# EAGLE board 13595-SparkFun_Ardumoto-panel.v20 (EAGLE 7.5.0), part 1 of 5
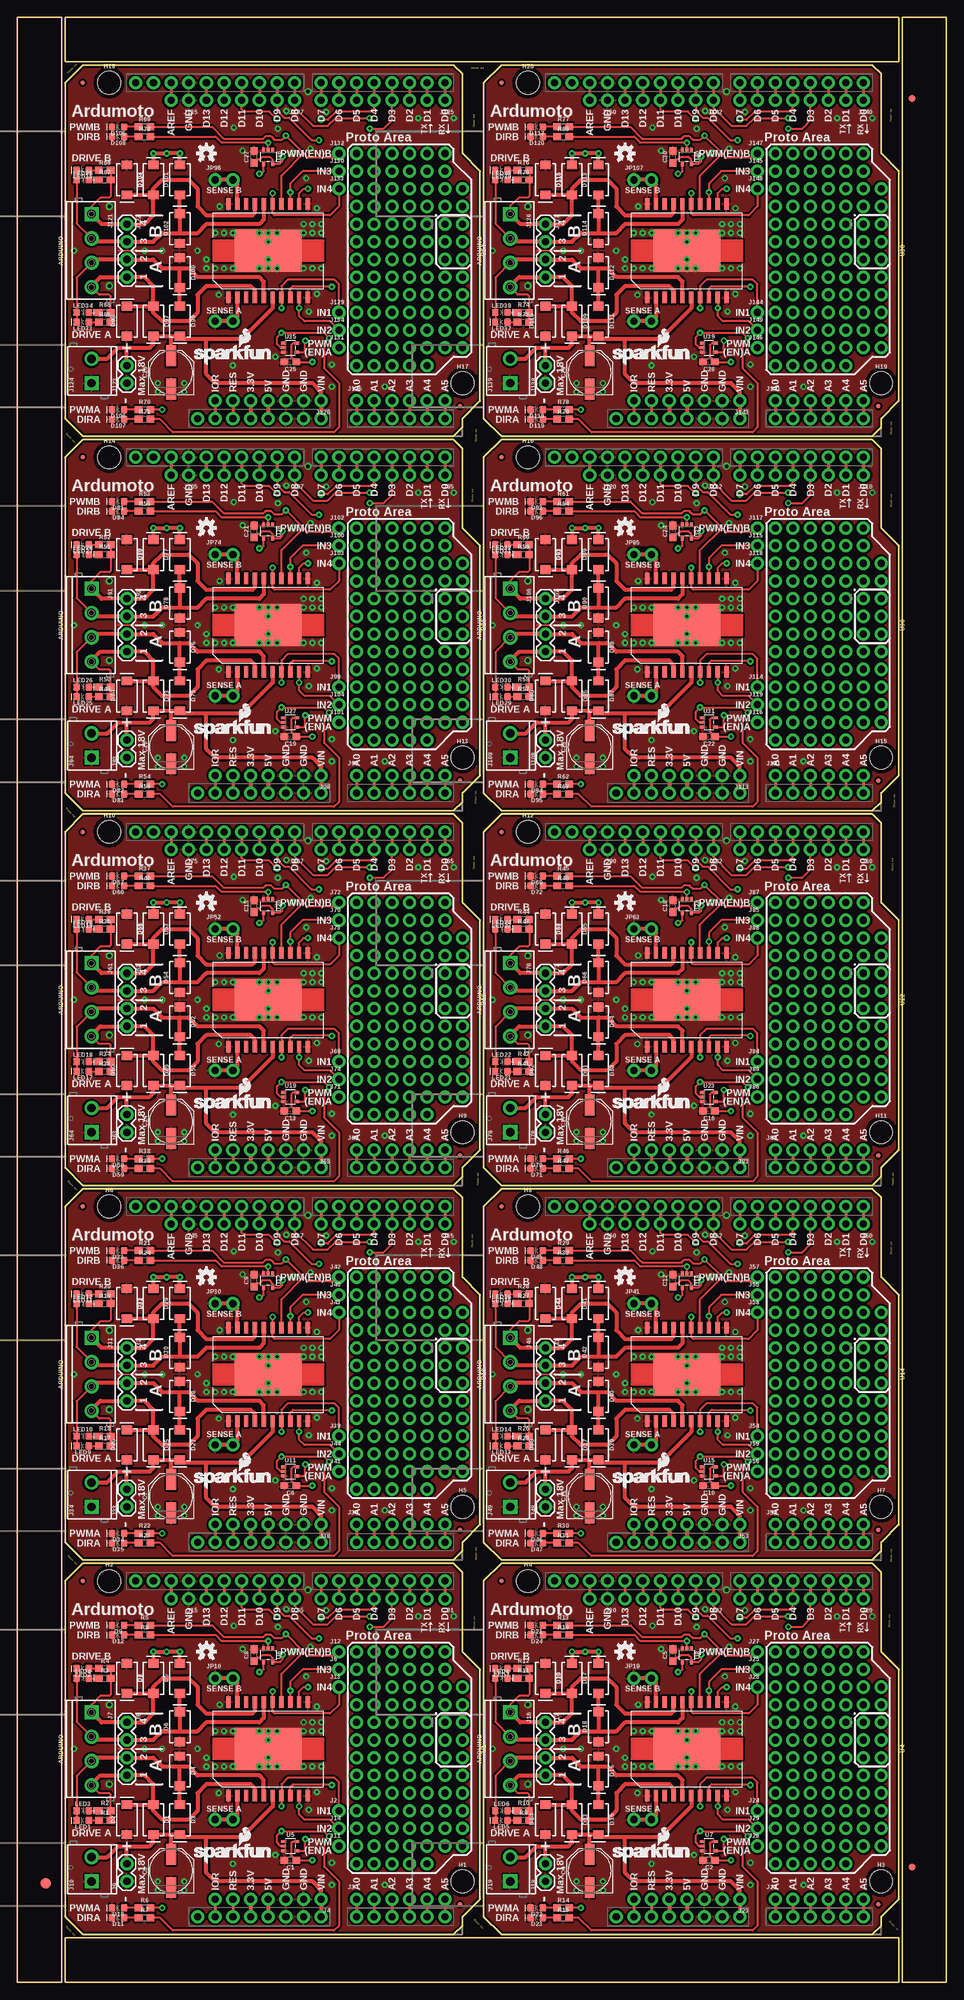
[diagram p0: board, top side]
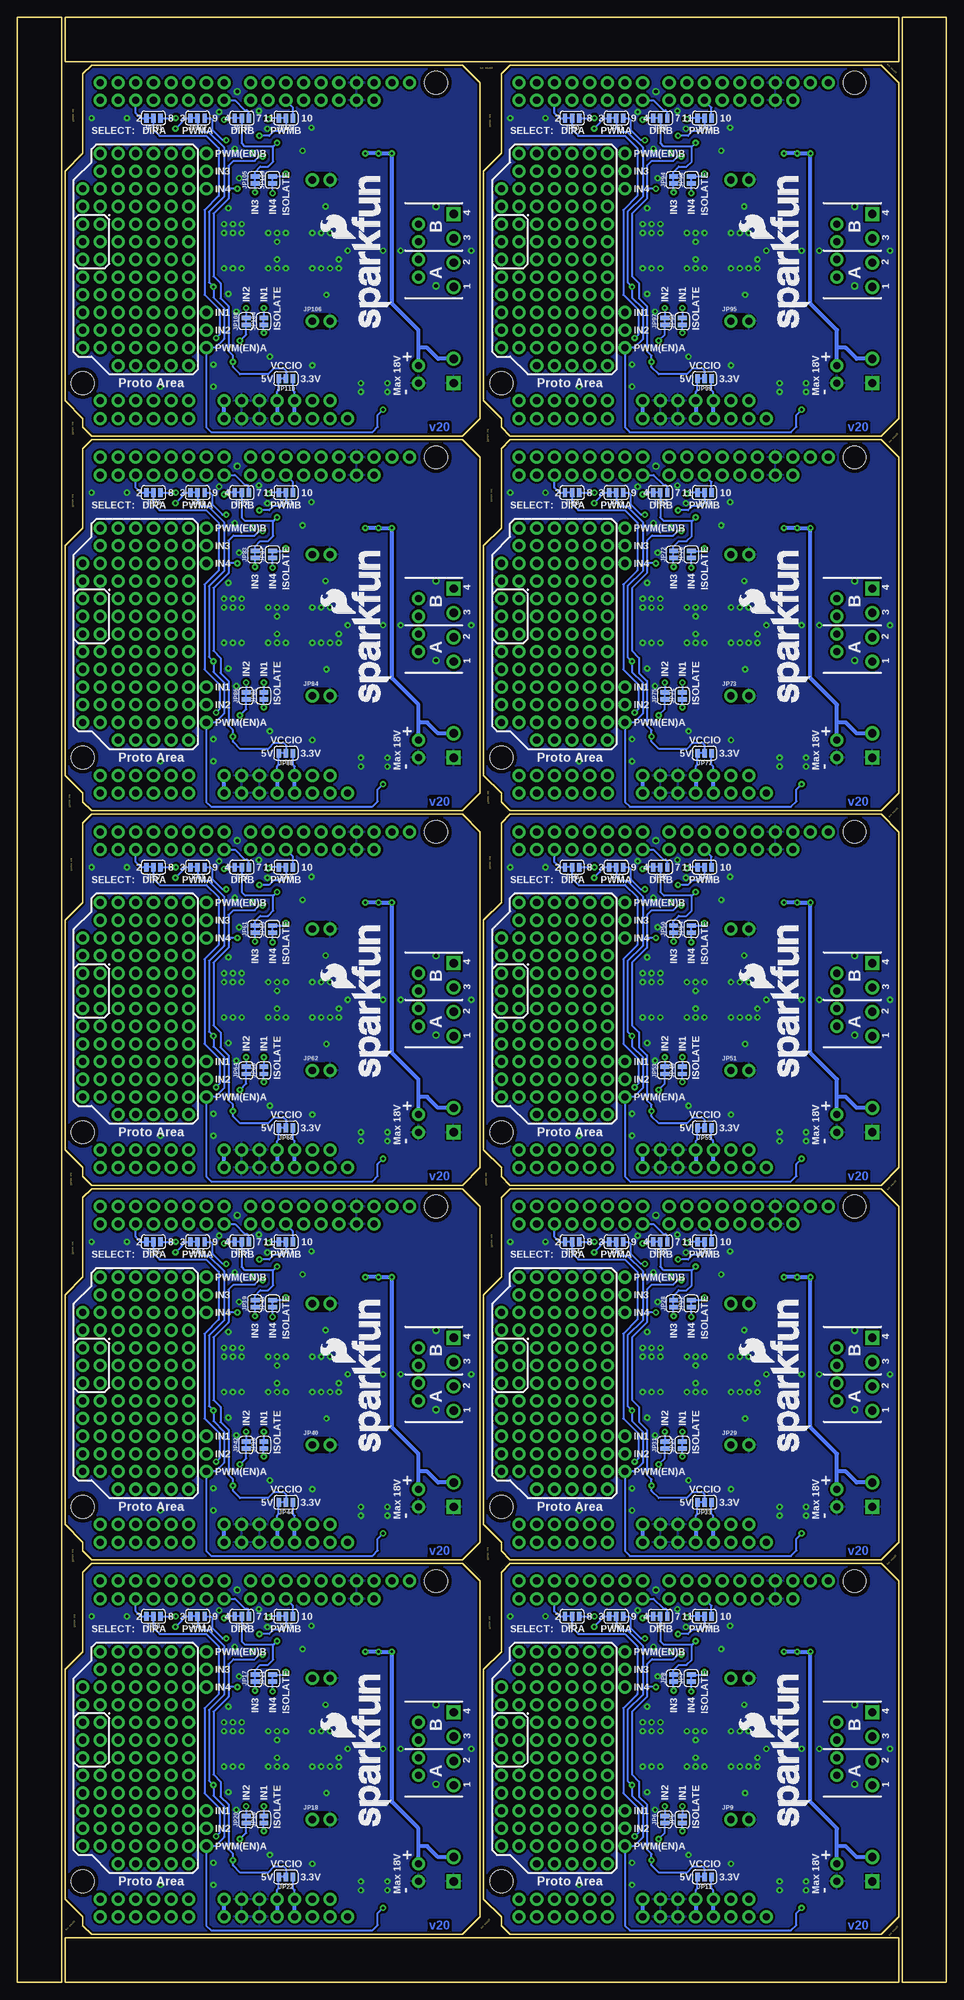
[diagram p1: board, bottom side, seen from below]

Size 133.6 x 282.45 mm. Coordinates in mm from the lower left corner, seen from the top.
Outline: 6.35,78.23 6.35,0 0,0 0,28.7
Outline: 0,26.16 0,282.45 6.35,282.45 6.35,75.69
Outline: 79.25,0 6.86,0 6.86,6.35 29.72,6.35
Outline: 27.18,6.35 126.75,6.35 126.75,0 76.71,0
Outline: 54.36,282.45 126.75,282.45 126.75,276.1 103.89,276.1
Outline: 106.43,276.1 6.86,276.1 6.86,282.45 56.9,282.45
Outline: 127.25,210.06 127.25,282.45 133.6,282.45 133.6,259.59
Outline: 133.6,262.13 133.6,0 127.25,0 127.25,212.6
Outline: 6.86,57.66 6.86,9.4 9.4,6.86 62.74,6.86 64.01,8.13 64.01,9.4 66.55,11.94 66.55,44.96 64.01,47.5 64.01,58.93 62.74,60.2 9.4,60.2 6.86,57.66
Outline: 67.06,57.66 67.06,9.4 69.6,6.86 122.94,6.86 124.21,8.13 124.21,9.4 126.75,11.94 126.75,44.96 124.21,47.5 124.21,58.93 122.94,60.2 69.6,60.2 67.06,57.66
Outline: 6.86,111.51 6.86,63.25 9.4,60.71 62.74,60.71 64.01,61.98 64.01,63.25 66.55,65.79 66.55,98.81 64.01,101.35 64.01,112.78 62.74,114.05 9.4,114.05 6.86,111.51
Outline: 67.06,111.51 67.06,63.25 69.6,60.71 122.94,60.71 124.21,61.98 124.21,63.25 126.75,65.79 126.75,98.81 124.21,101.35 124.21,112.78 122.94,114.05 69.6,114.05 67.06,111.51
Outline: 6.86,165.35 6.86,117.09 9.4,114.55 62.74,114.55 64.01,115.82 64.01,117.09 66.55,119.63 66.55,152.65 64.01,155.19 64.01,166.62 62.74,167.89 9.4,167.89 6.86,165.35
Outline: 67.06,165.35 67.06,117.09 69.6,114.55 122.94,114.55 124.21,115.82 124.21,117.09 126.75,119.63 126.75,152.65 124.21,155.19 124.21,166.62 122.94,167.89 69.6,167.89 67.06,165.35
Outline: 6.86,219.2 6.86,170.94 9.4,168.4 62.74,168.4 64.01,169.67 64.01,170.94 66.55,173.48 66.55,206.5 64.01,209.04 64.01,220.47 62.74,221.74 9.4,221.74 6.86,219.2
Outline: 67.06,219.2 67.06,170.94 69.6,168.4 122.94,168.4 124.21,169.67 124.21,170.94 126.75,173.48 126.75,206.5 124.21,209.04 124.21,220.47 122.94,221.74 69.6,221.74 67.06,219.2
Outline: 6.86,273.05 6.86,224.79 9.4,222.25 62.74,222.25 64.01,223.52 64.01,224.79 66.55,227.33 66.55,260.35 64.01,262.89 64.01,274.32 62.74,275.59 9.4,275.59 6.86,273.05
Outline: 67.06,273.05 67.06,224.79 69.6,222.25 122.94,222.25 124.21,223.52 124.21,224.79 126.75,227.33 126.75,260.35 124.21,262.89 124.21,274.32 122.94,275.59 69.6,275.59 67.06,273.05
Copper layers (1*16): Top 0.035mm / dielectric 1.5mm / Bottom 0.035mm
Design rules "SparkFun-2-layer-STANDARD": minimum track width 10mil, minimum drill 20mil, track to track 10mil, track to pad 8mil, pad to pad 8mil, via to via 10mil, smd to smd 8mil, copper to edge 8mil, drill to drill 8mil, minimum pad ring 10mil, minimum via ring 10mil, stop-mask expansion 4mil, vias tented up to drill 25mil, thermal gap 10mil
Net classes: 1 power: width 0.61 mm
tRestrict: area 29.1,22.5 to 31.9,24.2; area 29.1,42.8 to 31.9,44.6; area 89.3,22.5 to 92.1,24.2; area 89.3,42.8 to 92.1,44.6; area 29.1,76.3 to 31.9,78.1; area 29.1,96.7 to 31.9,98.4; area 89.3,76.3 to 92.1,78.1; area 89.3,96.7 to 92.1,98.4; area 29.1,130.2 to 31.9,131.9; area 29.1,150.5 to 31.9,152.3; area 89.3,130.2 to 92.1,131.9; area 89.3,150.5 to 92.1,152.3; area 29.1,184 to 31.9,185.8; area 29.1,204.4 to 31.9,206.1; area 89.3,184 to 92.1,185.8; area 89.3,204.4 to 92.1,206.1; area 29.1,237.9 to 31.9,239.6; area 29.1,258.2 to 31.9,260; area 89.3,237.9 to 92.1,239.6; area 89.3,258.2 to 92.1,260
bRestrict: area 29.1,22.5 to 31.9,24.2; area 29.1,42.8 to 31.9,44.6; area 89.3,22.5 to 92.1,24.2; area 89.3,42.8 to 92.1,44.6; area 29.1,76.3 to 31.9,78.1; area 29.1,96.7 to 31.9,98.4; area 89.3,76.3 to 92.1,78.1; area 89.3,96.7 to 92.1,98.4; area 29.1,130.2 to 31.9,131.9; area 29.1,150.5 to 31.9,152.3; area 89.3,130.2 to 92.1,131.9; area 89.3,150.5 to 92.1,152.3; area 29.1,184 to 31.9,185.8; area 29.1,204.4 to 31.9,206.1; area 89.3,184 to 92.1,185.8; area 89.3,204.4 to 92.1,206.1; area 29.1,237.9 to 31.9,239.6; area 29.1,258.2 to 31.9,260; area 89.3,237.9 to 92.1,239.6; area 89.3,258.2 to 92.1,260

## Footprints (pad centres in the part's own frame; a part is rotated, then mirrored left to right if it is on the bottom)
0603 = smd 1.1 x 1: 1 -0.85,0; 2 0.85,0
PANASONIC_D = smd 3 x 1.4: + 2.4,0; - -2.4,0
SMA-DIODE = smd 1.27 x 1.47: A -2.15,0; C 2.15,0
LED-0603 = smd 1 x 1: A -0.877,0; C 0.877,0
FIDUCIAL-1.5X3 = smd 1.5 x 1.5: 1 0,0
FIDUCIAL-1X2 = smd 1 x 1: 1 0,0
MICRO-FIDUCIAL = smd 0.635 x 0.635: 1 0,0
STAND-OFF = hole 3.302: 0,0
1X08_NO_SILK = drill 1.016 pad 1.88: 1 0,0; 2 2.54,0; 3 5.08,0; 4 7.62,0; 5 10.16,0; 6 12.7,0; 7 15.24,0; 8 17.78,0
1X01_NO_SILK = drill 1.016 pad 1.88: 1 0,0
1X06_NO_SILK = drill 1.016 pad 1.88: 1 0,0; 2 2.54,0; 3 5.08,0; 4 7.62,0; 5 10.16,0; 6 12.7,0
1X07_NO_SILK = drill 1.016 pad 1.88: 1 0,0; 2 2.54,0; 3 5.08,0; 4 7.62,0; 5 10.16,0; 6 12.7,0; 7 15.24,0
SCREWTERMINAL-3.5MM-4 = drill 1.2 pad 2.032 square: 1 0,0 | drill 1.2 pad 2.032: 2 3.5,0; 3 7,0; 4 10.5,0
1X04 = drill 1.016 pad 1.88: 1 0,0; 2 2.54,0; 3 5.08,0; 4 7.62,0
1X02 = drill 1.016 pad 1.88: 1 0,0; 2 2.54,0
SCREWTERMINAL-3.5MM-2 = drill 1.2 pad 2.032 square: 1 0,0 | drill 1.2 pad 2.032: 2 3.5,0
1X02_NO_SILK = drill 1.016 pad 1.88: 1 0,0; 2 2.54,0
SMT-JUMPER_3_1-NC_TRACE_SILK = smd 0.635 x 1.27: 1 -1.016,0; 2 0,0; 3 1.016,0
SMT-JUMPER_2_NC_TRACE_SILK = smd 0.635 x 1.27: 1 -0.508,0; 2 0.508,0
UNO_R3_SHIELD_NOLABELS = drill 1.016 pad 1.88: 3.3V 24.13,-3.81; 5V 24.13,-1.27; A0 24.13,11.43; A1 24.13,13.97; A2 24.13,16.51; A3 24.13,19.05; A4 24.13,21.59; A5 24.13,24.13; AREF -24.13,-15.24; D2 -24.13,19.05; D3 -24.13,16.51; D4 -24.13,13.97; D5 -24.13,11.43; D6 -24.13,8.89; D7 -24.13,6.35; D8 -24.13,2.54; D9 -24.13,0; D10 -24.13,-2.54; D11 -24.13,-5.08; D12 -24.13,-7.62; D13 -24.13,-10.16; GND@0 24.13,1.27; GND@1 24.13,3.81; GND@2 -24.13,-12.7; IOREF 24.13,-8.89; NC 24.13,-11.43; RES 24.13,-6.35; RX -24.13,24.13; SCL -24.13,-20.32; SDA -24.13,-17.78; TX -24.13,21.59; VIN 24.13,6.35
POWERSO20_L298_PAD = smd 1.651 x 0.635: 1 -6.731,5.715; 2 -6.731,4.445; 3 -6.731,3.175; 4 -6.731,1.905; 5 -6.731,0.635; 6 -6.731,-0.635; 7 -6.731,-1.905; 8 -6.731,-3.175; 9 -6.731,-4.445; 10 -6.731,-5.715; 11 6.731,-5.715; 12 6.731,-4.445; 13 6.731,-3.175; 14 6.731,-1.905; 15 6.731,-0.635; 16 6.731,0.635; 17 6.731,1.905; 18 6.731,3.175; 19 6.731,4.445; 20 6.731,5.715 | smd 5.994 x 9.601: PAD 0,0
SOT353 = smd 0.42 x 0.7: 1 -0.65,-0.95; 2 0,-0.95; 3 0.65,-0.95; 4 0.65,0.95; 5 -0.65,0.95

## Placement (x,y rotation side)
C1  0.1uF  [0603]  39.24,17.53 180 top
C2  0.1uF  [0603]  99.44,17.53 180 top
C3  100uF  [PANASONIC_D]  22.1,16 90 top
C4  100uF  [PANASONIC_D]  82.3,16 90 top
C5  0.1uF  [0603]  94.23,46.99 90 top
C6  0.1uF  [0603]  39.24,71.37 180 top
C7  100uF  [PANASONIC_D]  22.1,69.85 90 top
C8  0.1uF  [0603]  34.04,46.99 90 top
C9  0.1uF  [0603]  34.04,100.84 90 top
C10  0.1uF  [0603]  99.44,71.37 180 top
C11  100uF  [PANASONIC_D]  82.3,69.85 90 top
C12  0.1uF  [0603]  94.23,100.84 90 top
C13  0.1uF  [0603]  39.24,125.22 180 top
C14  100uF  [PANASONIC_D]  22.1,123.7 90 top
C15  0.1uF  [0603]  34.04,154.69 90 top
C16  0.1uF  [0603]  99.44,125.22 180 top
C17  100uF  [PANASONIC_D]  82.3,123.7 90 top
C18  0.1uF  [0603]  94.23,154.69 90 top
C19  0.1uF  [0603]  39.24,179.07 180 top
C20  100uF  [PANASONIC_D]  22.1,177.55 90 top
C21  0.1uF  [0603]  34.04,208.53 90 top
C22  0.1uF  [0603]  99.44,179.07 180 top
C23  100uF  [PANASONIC_D]  82.3,177.55 90 top
C24  0.1uF  [0603]  94.23,208.53 90 top
C25  0.1uF  [0603]  39.24,232.92 180 top
C26  100uF  [PANASONIC_D]  22.1,231.39 90 top
C27  0.1uF  [0603]  34.04,262.38 90 top
C28  0.1uF  [0603]  99.44,232.92 180 top
C29  100uF  [PANASONIC_D]  82.3,231.39 90 top
C30  0.1uF  [0603]  94.23,262.38 90 top
D1  1A/40V/500mV  [SMA-DIODE]  19.56,23.37 270 top
D2  1A/40V/500mV  [SMA-DIODE]  15.75,23.37 90 top
D3  1A/40V/500mV  [SMA-DIODE]  23.37,23.37 270 top
D4  1A/40V/500mV  [SMA-DIODE]  23.37,30.35 270 top
D5  1A/40V/500mV  [SMA-DIODE]  23.37,43.69 90 top
D6  1A/40V/500mV  [SMA-DIODE]  23.37,36.7 90 top
D7  1A/40V/500mV  [SMA-DIODE]  19.56,43.69 90 top
D8  1A/40V/500mV  [SMA-DIODE]  15.75,43.69 270 top
D9  RED  [LED-0603]  14.48,51.31 180 top
D10  RED  [LED-0603]  14.48,10.67 180 top
D11  RED  [LED-0603]  14.48,9.27 180 top
D12  RED  [LED-0603]  14.48,49.91 180 top
D13  1A/40V/500mV  [SMA-DIODE]  79.76,23.37 270 top
D14  1A/40V/500mV  [SMA-DIODE]  75.95,23.37 90 top
D15  1A/40V/500mV  [SMA-DIODE]  83.57,23.37 270 top
D16  1A/40V/500mV  [SMA-DIODE]  83.57,30.35 270 top
D17  1A/40V/500mV  [SMA-DIODE]  83.57,43.69 90 top
D18  1A/40V/500mV  [SMA-DIODE]  83.57,36.7 90 top
D19  1A/40V/500mV  [SMA-DIODE]  79.76,43.69 90 top
D20  1A/40V/500mV  [SMA-DIODE]  75.95,43.69 270 top
D21  RED  [LED-0603]  74.68,51.31 180 top
D22  RED  [LED-0603]  74.68,10.67 180 top
D23  RED  [LED-0603]  74.68,9.27 180 top
D24  RED  [LED-0603]  74.68,49.91 180 top
D25  1A/40V/500mV  [SMA-DIODE]  19.56,77.22 270 top
D26  1A/40V/500mV  [SMA-DIODE]  15.75,77.22 90 top
D27  1A/40V/500mV  [SMA-DIODE]  23.37,77.22 270 top
D28  1A/40V/500mV  [SMA-DIODE]  23.37,84.2 270 top
D29  1A/40V/500mV  [SMA-DIODE]  23.37,97.54 90 top
D30  1A/40V/500mV  [SMA-DIODE]  23.37,90.55 90 top
D31  1A/40V/500mV  [SMA-DIODE]  19.56,97.54 90 top
D32  1A/40V/500mV  [SMA-DIODE]  15.75,97.54 270 top
D33  RED  [LED-0603]  14.48,105.16 180 top
D34  RED  [LED-0603]  14.48,64.52 180 top
D35  RED  [LED-0603]  14.48,63.12 180 top
D36  RED  [LED-0603]  14.48,103.76 180 top
D37  1A/40V/500mV  [SMA-DIODE]  79.76,77.22 270 top
D38  1A/40V/500mV  [SMA-DIODE]  75.95,77.22 90 top
D39  1A/40V/500mV  [SMA-DIODE]  83.57,77.22 270 top
D40  1A/40V/500mV  [SMA-DIODE]  83.57,84.2 270 top
D41  1A/40V/500mV  [SMA-DIODE]  83.57,97.54 90 top
D42  1A/40V/500mV  [SMA-DIODE]  83.57,90.55 90 top
D43  1A/40V/500mV  [SMA-DIODE]  79.76,97.54 90 top
D44  1A/40V/500mV  [SMA-DIODE]  75.95,97.54 270 top
D45  RED  [LED-0603]  74.68,105.16 180 top
D46  RED  [LED-0603]  74.68,64.52 180 top
D47  RED  [LED-0603]  74.68,63.12 180 top
D48  RED  [LED-0603]  74.68,103.76 180 top
D49  1A/40V/500mV  [SMA-DIODE]  19.56,131.06 270 top
D50  1A/40V/500mV  [SMA-DIODE]  15.75,131.06 90 top
D51  1A/40V/500mV  [SMA-DIODE]  23.37,131.06 270 top
D52  1A/40V/500mV  [SMA-DIODE]  23.37,138.05 270 top
D53  1A/40V/500mV  [SMA-DIODE]  23.37,151.38 90 top
D54  1A/40V/500mV  [SMA-DIODE]  23.37,144.4 90 top
D55  1A/40V/500mV  [SMA-DIODE]  19.56,151.38 90 top
D56  1A/40V/500mV  [SMA-DIODE]  15.75,151.38 270 top
D57  RED  [LED-0603]  14.48,159 180 top
D58  RED  [LED-0603]  14.48,118.36 180 top
D59  RED  [LED-0603]  14.48,116.97 180 top
D60  RED  [LED-0603]  14.48,157.61 180 top
D61  1A/40V/500mV  [SMA-DIODE]  79.76,131.06 270 top
D62  1A/40V/500mV  [SMA-DIODE]  75.95,131.06 90 top
D63  1A/40V/500mV  [SMA-DIODE]  83.57,131.06 270 top
D64  1A/40V/500mV  [SMA-DIODE]  83.57,138.05 270 top
D65  1A/40V/500mV  [SMA-DIODE]  83.57,151.38 90 top
D66  1A/40V/500mV  [SMA-DIODE]  83.57,144.4 90 top
D67  1A/40V/500mV  [SMA-DIODE]  79.76,151.38 90 top
D68  1A/40V/500mV  [SMA-DIODE]  75.95,151.38 270 top
D69  RED  [LED-0603]  74.68,159 180 top
D70  RED  [LED-0603]  74.68,118.36 180 top
D71  RED  [LED-0603]  74.68,116.97 180 top
D72  RED  [LED-0603]  74.68,157.61 180 top
D73  1A/40V/500mV  [SMA-DIODE]  19.56,184.91 270 top
D74  1A/40V/500mV  [SMA-DIODE]  15.75,184.91 90 top
D75  1A/40V/500mV  [SMA-DIODE]  23.37,184.91 270 top
D76  1A/40V/500mV  [SMA-DIODE]  23.37,191.9 270 top
D77  1A/40V/500mV  [SMA-DIODE]  23.37,205.23 90 top
D78  1A/40V/500mV  [SMA-DIODE]  23.37,198.25 90 top
D79  1A/40V/500mV  [SMA-DIODE]  19.56,205.23 90 top
D80  1A/40V/500mV  [SMA-DIODE]  15.75,205.23 270 top
D81  RED  [LED-0603]  14.48,212.85 180 top
D82  RED  [LED-0603]  14.48,172.21 180 top
D83  RED  [LED-0603]  14.48,170.81 180 top
D84  RED  [LED-0603]  14.48,211.46 180 top
D85  1A/40V/500mV  [SMA-DIODE]  79.76,184.91 270 top
D86  1A/40V/500mV  [SMA-DIODE]  75.95,184.91 90 top
D87  1A/40V/500mV  [SMA-DIODE]  83.57,184.91 270 top
D88  1A/40V/500mV  [SMA-DIODE]  83.57,191.9 270 top
D89  1A/40V/500mV  [SMA-DIODE]  83.57,205.23 90 top
D90  1A/40V/500mV  [SMA-DIODE]  83.57,198.25 90 top
D91  1A/40V/500mV  [SMA-DIODE]  79.76,205.23 90 top
D92  1A/40V/500mV  [SMA-DIODE]  75.95,205.23 270 top
D93  RED  [LED-0603]  74.68,212.85 180 top
D94  RED  [LED-0603]  74.68,172.21 180 top
D95  RED  [LED-0603]  74.68,170.81 180 top
D96  RED  [LED-0603]  74.68,211.46 180 top
D97  1A/40V/500mV  [SMA-DIODE]  19.56,238.76 270 top
D98  1A/40V/500mV  [SMA-DIODE]  15.75,238.76 90 top
D99  1A/40V/500mV  [SMA-DIODE]  23.37,238.76 270 top
D100  1A/40V/500mV  [SMA-DIODE]  23.37,245.75 270 top
D101  1A/40V/500mV  [SMA-DIODE]  23.37,259.08 90 top
D102  1A/40V/500mV  [SMA-DIODE]  23.37,252.09 90 top
D103  1A/40V/500mV  [SMA-DIODE]  19.56,259.08 90 top
D104  1A/40V/500mV  [SMA-DIODE]  15.75,259.08 270 top
D105  RED  [LED-0603]  14.48,266.7 180 top
D106  RED  [LED-0603]  14.48,226.06 180 top
D107  RED  [LED-0603]  14.48,224.66 180 top
D108  RED  [LED-0603]  14.48,265.3 180 top
D109  1A/40V/500mV  [SMA-DIODE]  79.76,238.76 270 top
D110  1A/40V/500mV  [SMA-DIODE]  75.95,238.76 90 top
D111  1A/40V/500mV  [SMA-DIODE]  83.57,238.76 270 top
D112  1A/40V/500mV  [SMA-DIODE]  83.57,245.75 270 top
D113  1A/40V/500mV  [SMA-DIODE]  83.57,259.08 90 top
D114  1A/40V/500mV  [SMA-DIODE]  83.57,252.09 90 top
D115  1A/40V/500mV  [SMA-DIODE]  79.76,259.08 90 top
D116  1A/40V/500mV  [SMA-DIODE]  75.95,259.08 270 top
D117  RED  [LED-0603]  74.68,266.7 180 top
D118  RED  [LED-0603]  74.68,226.06 180 top
D119  RED  [LED-0603]  74.68,224.66 180 top
D120  RED  [LED-0603]  74.68,265.3 180 top
E$1  [FIDUCIAL-1.5X3]  4.06,14.22 0 top
E$7  [FIDUCIAL-1X2]  128.65,270.76 180 top
E$8  [FIDUCIAL-1X2]  128.65,16.51 0 top
FD1  FIDUCIALUFIDUCIAL  [MICRO-FIDUCIAL]  9.4,57.66 0 top
FD2  FIDUCIALUFIDUCIAL  [MICRO-FIDUCIAL]  63.63,11.18 0 top
FD3  FIDUCIALUFIDUCIAL  [MICRO-FIDUCIAL]  69.6,57.66 0 top
FD4  FIDUCIALUFIDUCIAL  [MICRO-FIDUCIAL]  123.83,11.18 0 top
FD5  FIDUCIALUFIDUCIAL  [MICRO-FIDUCIAL]  9.4,111.51 0 top
FD6  FIDUCIALUFIDUCIAL  [MICRO-FIDUCIAL]  63.63,65.02 0 top
FD7  FIDUCIALUFIDUCIAL  [MICRO-FIDUCIAL]  69.6,111.51 0 top
FD8  FIDUCIALUFIDUCIAL  [MICRO-FIDUCIAL]  123.83,65.02 0 top
FD9  FIDUCIALUFIDUCIAL  [MICRO-FIDUCIAL]  9.4,165.35 0 top
FD10  FIDUCIALUFIDUCIAL  [MICRO-FIDUCIAL]  63.63,118.87 0 top
FD11  FIDUCIALUFIDUCIAL  [MICRO-FIDUCIAL]  69.6,165.35 0 top
FD12  FIDUCIALUFIDUCIAL  [MICRO-FIDUCIAL]  123.83,118.87 0 top
FD13  FIDUCIALUFIDUCIAL  [MICRO-FIDUCIAL]  9.4,219.2 0 top
FD14  FIDUCIALUFIDUCIAL  [MICRO-FIDUCIAL]  63.63,172.72 0 top
FD15  FIDUCIALUFIDUCIAL  [MICRO-FIDUCIAL]  69.6,219.2 0 top
FD16  FIDUCIALUFIDUCIAL  [MICRO-FIDUCIAL]  123.83,172.72 0 top
FD17  FIDUCIALUFIDUCIAL  [MICRO-FIDUCIAL]  9.4,273.05 0 top
FD18  FIDUCIALUFIDUCIAL  [MICRO-FIDUCIAL]  63.63,226.57 0 top
FD19  FIDUCIALUFIDUCIAL  [MICRO-FIDUCIAL]  69.6,273.05 0 top
FD20  FIDUCIALUFIDUCIAL  [MICRO-FIDUCIAL]  123.83,226.57 0 top
H1  STAND-OFF  [STAND-OFF]  64.01,14.48 0 top
H2  STAND-OFF  [STAND-OFF]  13.21,57.66 0 top
H3  STAND-OFF  [STAND-OFF]  124.21,14.48 0 top
H4  STAND-OFF  [STAND-OFF]  73.41,57.66 0 top
H5  STAND-OFF  [STAND-OFF]  64.01,68.33 0 top
H6  STAND-OFF  [STAND-OFF]  13.21,111.51 0 top
H7  STAND-OFF  [STAND-OFF]  124.21,68.33 0 top
H8  STAND-OFF  [STAND-OFF]  73.41,111.51 0 top
H9  STAND-OFF  [STAND-OFF]  64.01,122.17 0 top
H10  STAND-OFF  [STAND-OFF]  13.21,165.35 0 top
H11  STAND-OFF  [STAND-OFF]  124.21,122.17 0 top
H12  STAND-OFF  [STAND-OFF]  73.41,165.35 0 top
H13  STAND-OFF  [STAND-OFF]  64.01,176.02 0 top
H14  STAND-OFF  [STAND-OFF]  13.21,219.2 0 top
H15  STAND-OFF  [STAND-OFF]  124.21,176.02 0 top
H16  STAND-OFF  [STAND-OFF]  73.41,219.2 0 top
H17  STAND-OFF  [STAND-OFF]  64.01,229.87 0 top
H18  STAND-OFF  [STAND-OFF]  13.21,273.05 0 top
H19  STAND-OFF  [STAND-OFF]  124.21,229.87 0 top
H20  STAND-OFF  [STAND-OFF]  73.41,273.05 0 top
J1  [1X08_NO_SILK]  61.47,55.12 180 top
J2  [1X01_NO_SILK]  46.23,24.64 0 top
J3  [1X06_NO_SILK]  48.77,11.94 0 top
J4  [1X07_NO_SILK]  43.69,11.94 180 top
J5  [1X06_NO_SILK]  39.88,55.12 180 top
J6  [1X01_NO_SILK]  46.23,44.96 0 top
J7  [SCREWTERMINAL-3.5MM-4]  10.67,38.79 270 top
J8  [1X04]  15.75,37.34 270 top
J9  [1X02]  15.75,14.48 90 top
J10  [SCREWTERMINAL-3.5MM-2]  10.67,14.48 90 top
J11  [1X01_NO_SILK]  46.23,19.56 0 top
J12  [1X01_NO_SILK]  46.23,47.5 0 top
J13  [1X01_NO_SILK]  46.23,42.42 0 top
J14  [1X01_NO_SILK]  46.23,22.1 0 top
J15  [1X02_NO_SILK]  24.64,55.12 180 top
J16  [SCREWTERMINAL-3.5MM-4]  70.87,38.79 270 top
J17  [1X04]  75.95,37.34 270 top
J18  [1X02]  75.95,14.48 90 top
J19  [SCREWTERMINAL-3.5MM-2]  70.87,14.48 90 top
J20  [1X08_NO_SILK]  121.67,55.12 180 top
J21  [1X06_NO_SILK]  108.97,11.94 0 top
J22  [1X06_NO_SILK]  100.08,55.12 180 top
J23  [1X07_NO_SILK]  103.89,11.94 180 top
J24  [1X01_NO_SILK]  106.43,24.64 0 top
J25  [1X01_NO_SILK]  106.43,44.96 0 top
J26  [1X01_NO_SILK]  106.43,19.56 0 top
J27  [1X01_NO_SILK]  106.43,47.5 0 top
J28  [1X01_NO_SILK]  106.43,42.42 0 top
J29  [1X01_NO_SILK]  106.43,22.1 0 top
J30  [1X02_NO_SILK]  84.84,55.12 180 top
J31  [SCREWTERMINAL-3.5MM-4]  10.67,92.63 270 top
J32  [1X04]  15.75,91.19 270 top
J33  [1X02]  15.75,68.33 90 top
J34  [SCREWTERMINAL-3.5MM-2]  10.67,68.33 90 top
J35  [1X08_NO_SILK]  61.47,108.97 180 top
J36  [1X06_NO_SILK]  48.77,65.79 0 top
J37  [1X06_NO_SILK]  39.88,108.97 180 top
J38  [1X07_NO_SILK]  43.69,65.79 180 top
J39  [1X01_NO_SILK]  46.23,78.49 0 top
J40  [1X01_NO_SILK]  46.23,98.81 0 top
J41  [1X01_NO_SILK]  46.23,73.41 0 top
J42  [1X01_NO_SILK]  46.23,101.35 0 top
J43  [1X01_NO_SILK]  46.23,96.27 0 top
J44  [1X01_NO_SILK]  46.23,75.95 0 top
J45  [1X02_NO_SILK]  24.64,108.97 180 top
J46  [SCREWTERMINAL-3.5MM-4]  70.87,92.63 270 top
J47  [1X04]  75.95,91.19 270 top
J48  [1X02]  75.95,68.33 90 top
J49  [SCREWTERMINAL-3.5MM-2]  70.87,68.33 90 top
J50  [1X08_NO_SILK]  121.67,108.97 180 top
J51  [1X06_NO_SILK]  108.97,65.79 0 top
J52  [1X06_NO_SILK]  100.08,108.97 180 top
J53  [1X07_NO_SILK]  103.89,65.79 180 top
J54  [1X01_NO_SILK]  106.43,78.49 0 top
J55  [1X01_NO_SILK]  106.43,98.81 0 top
J56  [1X01_NO_SILK]  106.43,73.41 0 top
J57  [1X01_NO_SILK]  106.43,101.35 0 top
J58  [1X01_NO_SILK]  106.43,96.27 0 top
J59  [1X01_NO_SILK]  106.43,75.95 0 top
J60  [1X02_NO_SILK]  84.84,108.97 180 top
J61  [SCREWTERMINAL-3.5MM-4]  10.67,146.48 270 top
J62  [1X04]  15.75,145.03 270 top
J63  [1X02]  15.75,122.17 90 top
J64  [SCREWTERMINAL-3.5MM-2]  10.67,122.17 90 top
J65  [1X08_NO_SILK]  61.47,162.81 180 top
J66  [1X06_NO_SILK]  48.77,119.63 0 top
J67  [1X06_NO_SILK]  39.88,162.81 180 top
J68  [1X07_NO_SILK]  43.69,119.63 180 top
J69  [1X01_NO_SILK]  46.23,132.33 0 top
J70  [1X01_NO_SILK]  46.23,152.65 0 top
J71  [1X01_NO_SILK]  46.23,127.25 0 top
J72  [1X01_NO_SILK]  46.23,155.19 0 top
J73  [1X01_NO_SILK]  46.23,150.11 0 top
J74  [1X01_NO_SILK]  46.23,129.79 0 top
J75  [1X02_NO_SILK]  24.64,162.81 180 top
J76  [SCREWTERMINAL-3.5MM-4]  70.87,146.48 270 top
J77  [1X04]  75.95,145.03 270 top
J78  [1X02]  75.95,122.17 90 top
J79  [SCREWTERMINAL-3.5MM-2]  70.87,122.17 90 top
J80  [1X08_NO_SILK]  121.67,162.81 180 top
J81  [1X06_NO_SILK]  108.97,119.63 0 top
J82  [1X06_NO_SILK]  100.08,162.81 180 top
J83  [1X07_NO_SILK]  103.89,119.63 180 top
J84  [1X01_NO_SILK]  106.43,132.33 0 top
J85  [1X01_NO_SILK]  106.43,152.65 0 top
J86  [1X01_NO_SILK]  106.43,127.25 0 top
J87  [1X01_NO_SILK]  106.43,155.19 0 top
J88  [1X01_NO_SILK]  106.43,150.11 0 top
J89  [1X01_NO_SILK]  106.43,129.79 0 top
J90  [1X02_NO_SILK]  84.84,162.81 180 top
J91  [SCREWTERMINAL-3.5MM-4]  10.67,200.33 270 top
J92  [1X04]  15.75,198.88 270 top
J93  [1X02]  15.75,176.02 90 top
J94  [SCREWTERMINAL-3.5MM-2]  10.67,176.02 90 top
J95  [1X08_NO_SILK]  61.47,216.66 180 top
J96  [1X06_NO_SILK]  48.77,173.48 0 top
J97  [1X06_NO_SILK]  39.88,216.66 180 top
J98  [1X07_NO_SILK]  43.69,173.48 180 top
J99  [1X01_NO_SILK]  46.23,186.18 0 top
J100  [1X01_NO_SILK]  46.23,206.5 0 top
J101  [1X01_NO_SILK]  46.23,181.1 0 top
J102  [1X01_NO_SILK]  46.23,209.04 0 top
J103  [1X01_NO_SILK]  46.23,203.96 0 top
J104  [1X01_NO_SILK]  46.23,183.64 0 top
J105  [1X02_NO_SILK]  24.64,216.66 180 top
J106  [SCREWTERMINAL-3.5MM-4]  70.87,200.33 270 top
J107  [1X04]  75.95,198.88 270 top
J108  [1X02]  75.95,176.02 90 top
J109  [SCREWTERMINAL-3.5MM-2]  70.87,176.02 90 top
J110  [1X08_NO_SILK]  121.67,216.66 180 top
J111  [1X06_NO_SILK]  108.97,173.48 0 top
J112  [1X06_NO_SILK]  100.08,216.66 180 top
J113  [1X07_NO_SILK]  103.89,173.48 180 top
J114  [1X01_NO_SILK]  106.43,186.18 0 top
J115  [1X01_NO_SILK]  106.43,206.5 0 top
J116  [1X01_NO_SILK]  106.43,181.1 0 top
J117  [1X01_NO_SILK]  106.43,209.04 0 top
J118  [1X01_NO_SILK]  106.43,203.96 0 top
J119  [1X01_NO_SILK]  106.43,183.64 0 top
J120  [1X02_NO_SILK]  84.84,216.66 180 top
J121  [SCREWTERMINAL-3.5MM-4]  10.67,254.18 270 top
J122  [1X04]  15.75,252.73 270 top
J123  [1X02]  15.75,229.87 90 top
J124  [SCREWTERMINAL-3.5MM-2]  10.67,229.87 90 top
J125  [1X08_NO_SILK]  61.47,270.51 180 top
J126  [1X06_NO_SILK]  48.77,227.33 0 top
J127  [1X06_NO_SILK]  39.88,270.51 180 top
J128  [1X07_NO_SILK]  43.69,227.33 180 top
J129  [1X01_NO_SILK]  46.23,240.03 0 top
J130  [1X01_NO_SILK]  46.23,260.35 0 top
J131  [1X01_NO_SILK]  46.23,234.95 0 top
J132  [1X01_NO_SILK]  46.23,262.89 0 top
J133  [1X01_NO_SILK]  46.23,257.81 0 top
J134  [1X01_NO_SILK]  46.23,237.49 0 top
J135  [1X02_NO_SILK]  24.64,270.51 180 top
J136  [SCREWTERMINAL-3.5MM-4]  70.87,254.18 270 top
J137  [1X04]  75.95,252.73 270 top
J138  [1X02]  75.95,229.87 90 top
J139  [SCREWTERMINAL-3.5MM-2]  70.87,229.87 90 top
J140  [1X08_NO_SILK]  121.67,270.51 180 top
J141  [1X06_NO_SILK]  108.97,227.33 0 top
J142  [1X06_NO_SILK]  100.08,270.51 180 top
J143  [1X07_NO_SILK]  103.89,227.33 180 top
J144  [1X01_NO_SILK]  106.43,240.03 0 top
J145  [1X01_NO_SILK]  106.43,260.35 0 top
J146  [1X01_NO_SILK]  106.43,234.95 0 top
J147  [1X01_NO_SILK]  106.43,262.89 0 top
J148  [1X01_NO_SILK]  106.43,257.81 0 top
J149  [1X01_NO_SILK]  106.43,237.49 0 top
J150  [1X02_NO_SILK]  84.84,270.51 180 top
JP1  31NCT  [SMT-JUMPER_3_1-NC_TRACE_SILK]  53.85,52.58 180 bottom
JP2  31NCT  [SMT-JUMPER_3_1-NC_TRACE_SILK]  47.5,52.58 180 bottom
JP3  31NCT  [SMT-JUMPER_3_1-NC_TRACE_SILK]  41.15,52.58 180 bottom
JP4  31NCT  [SMT-JUMPER_3_1-NC_TRACE_SILK]  34.8,52.58 180 bottom
JP5  2NCT  [SMT-JUMPER_2_NC_TRACE_SILK]  37.97,23.37 90 bottom
JP6  2NCT  [SMT-JUMPER_2_NC_TRACE_SILK]  40.51,23.37 90 bottom
JP7  2NCT  [SMT-JUMPER_2_NC_TRACE_SILK]  36.7,43.69 90 bottom
JP8  2NCT  [SMT-JUMPER_2_NC_TRACE_SILK]  39.24,43.69 90 bottom
JP9  [1X02_NO_SILK]  30.99,23.37 0 bottom
JP10  [1X02_NO_SILK]  28.45,43.69 0 top
JP11  31NCT  [SMT-JUMPER_3_1-NC_TRACE_SILK]  34.8,15.11 180 bottom
JP12  31NCT  [SMT-JUMPER_3_1-NC_TRACE_SILK]  101.35,52.58 180 bottom
JP13  31NCT  [SMT-JUMPER_3_1-NC_TRACE_SILK]  114.05,52.58 180 bottom
JP14  31NCT  [SMT-JUMPER_3_1-NC_TRACE_SILK]  107.7,52.58 180 bottom
JP15  31NCT  [SMT-JUMPER_3_1-NC_TRACE_SILK]  95,52.58 180 bottom
JP16  2NCT  [SMT-JUMPER_2_NC_TRACE_SILK]  98.17,23.37 90 bottom
JP17  2NCT  [SMT-JUMPER_2_NC_TRACE_SILK]  99.44,43.69 90 bottom
JP18  [1X02_NO_SILK]  91.19,23.37 0 bottom
JP19  [1X02_NO_SILK]  88.65,43.69 0 top
JP20  2NCT  [SMT-JUMPER_2_NC_TRACE_SILK]  100.71,23.37 90 bottom
JP21  2NCT  [SMT-JUMPER_2_NC_TRACE_SILK]  96.9,43.69 90 bottom
JP22  31NCT  [SMT-JUMPER_3_1-NC_TRACE_SILK]  95,15.11 180 bottom
JP23  31NCT  [SMT-JUMPER_3_1-NC_TRACE_SILK]  41.15,106.43 180 bottom
JP24  31NCT  [SMT-JUMPER_3_1-NC_TRACE_SILK]  53.85,106.43 180 bottom
JP25  31NCT  [SMT-JUMPER_3_1-NC_TRACE_SILK]  47.5,106.43 180 bottom
JP26  31NCT  [SMT-JUMPER_3_1-NC_TRACE_SILK]  34.8,106.43 180 bottom
JP27  2NCT  [SMT-JUMPER_2_NC_TRACE_SILK]  37.97,77.22 90 bottom
JP28  2NCT  [SMT-JUMPER_2_NC_TRACE_SILK]  39.24,97.54 90 bottom
JP29  [1X02_NO_SILK]  30.99,77.22 0 bottom
JP30  [1X02_NO_SILK]  28.45,97.54 0 top
JP31  2NCT  [SMT-JUMPER_2_NC_TRACE_SILK]  40.51,77.22 90 bottom
JP32  2NCT  [SMT-JUMPER_2_NC_TRACE_SILK]  36.7,97.54 90 bottom
JP33  31NCT  [SMT-JUMPER_3_1-NC_TRACE_SILK]  34.8,68.96 180 bottom
JP34  31NCT  [SMT-JUMPER_3_1-NC_TRACE_SILK]  101.35,106.43 180 bottom
JP35  31NCT  [SMT-JUMPER_3_1-NC_TRACE_SILK]  114.05,106.43 180 bottom
JP36  31NCT  [SMT-JUMPER_3_1-NC_TRACE_SILK]  107.7,106.43 180 bottom
JP37  31NCT  [SMT-JUMPER_3_1-NC_TRACE_SILK]  95,106.43 180 bottom
JP38  2NCT  [SMT-JUMPER_2_NC_TRACE_SILK]  98.17,77.22 90 bottom
JP39  2NCT  [SMT-JUMPER_2_NC_TRACE_SILK]  99.44,97.54 90 bottom
JP40  [1X02_NO_SILK]  91.19,77.22 0 bottom
JP41  [1X02_NO_SILK]  88.65,97.54 0 top
JP42  2NCT  [SMT-JUMPER_2_NC_TRACE_SILK]  100.71,77.22 90 bottom
JP43  2NCT  [SMT-JUMPER_2_NC_TRACE_SILK]  96.9,97.54 90 bottom
JP44  31NCT  [SMT-JUMPER_3_1-NC_TRACE_SILK]  95,68.96 180 bottom
JP45  31NCT  [SMT-JUMPER_3_1-NC_TRACE_SILK]  41.15,160.27 180 bottom
JP46  31NCT  [SMT-JUMPER_3_1-NC_TRACE_SILK]  53.85,160.27 180 bottom
JP47  31NCT  [SMT-JUMPER_3_1-NC_TRACE_SILK]  47.5,160.27 180 bottom
JP48  31NCT  [SMT-JUMPER_3_1-NC_TRACE_SILK]  34.8,160.27 180 bottom
JP49  2NCT  [SMT-JUMPER_2_NC_TRACE_SILK]  37.97,131.06 90 bottom
JP50  2NCT  [SMT-JUMPER_2_NC_TRACE_SILK]  39.24,151.38 90 bottom
JP51  [1X02_NO_SILK]  30.99,131.06 0 bottom
JP52  [1X02_NO_SILK]  28.45,151.38 0 top
JP53  2NCT  [SMT-JUMPER_2_NC_TRACE_SILK]  40.51,131.06 90 bottom
JP54  2NCT  [SMT-JUMPER_2_NC_TRACE_SILK]  36.7,151.38 90 bottom
JP55  31NCT  [SMT-JUMPER_3_1-NC_TRACE_SILK]  34.8,122.81 180 bottom
JP56  31NCT  [SMT-JUMPER_3_1-NC_TRACE_SILK]  101.35,160.27 180 bottom
JP57  31NCT  [SMT-JUMPER_3_1-NC_TRACE_SILK]  114.05,160.27 180 bottom
JP58  31NCT  [SMT-JUMPER_3_1-NC_TRACE_SILK]  107.7,160.27 180 bottom
JP59  31NCT  [SMT-JUMPER_3_1-NC_TRACE_SILK]  95,160.27 180 bottom
JP60  2NCT  [SMT-JUMPER_2_NC_TRACE_SILK]  98.17,131.06 90 bottom
JP61  2NCT  [SMT-JUMPER_2_NC_TRACE_SILK]  99.44,151.38 90 bottom
JP62  [1X02_NO_SILK]  91.19,131.06 0 bottom
JP63  [1X02_NO_SILK]  88.65,151.38 0 top
JP64  2NCT  [SMT-JUMPER_2_NC_TRACE_SILK]  100.71,131.06 90 bottom
JP65  2NCT  [SMT-JUMPER_2_NC_TRACE_SILK]  96.9,151.38 90 bottom
JP66  31NCT  [SMT-JUMPER_3_1-NC_TRACE_SILK]  95,122.81 180 bottom
JP67  31NCT  [SMT-JUMPER_3_1-NC_TRACE_SILK]  41.15,214.12 180 bottom
JP68  31NCT  [SMT-JUMPER_3_1-NC_TRACE_SILK]  53.85,214.12 180 bottom
JP69  31NCT  [SMT-JUMPER_3_1-NC_TRACE_SILK]  47.5,214.12 180 bottom
JP70  31NCT  [SMT-JUMPER_3_1-NC_TRACE_SILK]  34.8,214.12 180 bottom
JP71  2NCT  [SMT-JUMPER_2_NC_TRACE_SILK]  37.97,184.91 90 bottom
JP72  2NCT  [SMT-JUMPER_2_NC_TRACE_SILK]  39.24,205.23 90 bottom
JP73  [1X02_NO_SILK]  30.99,184.91 0 bottom
JP74  [1X02_NO_SILK]  28.45,205.23 0 top
JP75  2NCT  [SMT-JUMPER_2_NC_TRACE_SILK]  40.51,184.91 90 bottom
JP76  2NCT  [SMT-JUMPER_2_NC_TRACE_SILK]  36.7,205.23 90 bottom
JP77  31NCT  [SMT-JUMPER_3_1-NC_TRACE_SILK]  34.8,176.66 180 bottom
JP78  31NCT  [SMT-JUMPER_3_1-NC_TRACE_SILK]  101.35,214.12 180 bottom
JP79  31NCT  [SMT-JUMPER_3_1-NC_TRACE_SILK]  114.05,214.12 180 bottom
JP80  31NCT  [SMT-JUMPER_3_1-NC_TRACE_SILK]  107.7,214.12 180 bottom
JP81  31NCT  [SMT-JUMPER_3_1-NC_TRACE_SILK]  95,214.12 180 bottom
JP82  2NCT  [SMT-JUMPER_2_NC_TRACE_SILK]  98.17,184.91 90 bottom
JP83  2NCT  [SMT-JUMPER_2_NC_TRACE_SILK]  99.44,205.23 90 bottom
JP84  [1X02_NO_SILK]  91.19,184.91 0 bottom
JP85  [1X02_NO_SILK]  88.65,205.23 0 top
JP86  2NCT  [SMT-JUMPER_2_NC_TRACE_SILK]  100.71,184.91 90 bottom
JP87  2NCT  [SMT-JUMPER_2_NC_TRACE_SILK]  96.9,205.23 90 bottom
JP88  31NCT  [SMT-JUMPER_3_1-NC_TRACE_SILK]  95,176.66 180 bottom
JP89  31NCT  [SMT-JUMPER_3_1-NC_TRACE_SILK]  41.15,267.97 180 bottom
JP90  31NCT  [SMT-JUMPER_3_1-NC_TRACE_SILK]  53.85,267.97 180 bottom
JP91  31NCT  [SMT-JUMPER_3_1-NC_TRACE_SILK]  47.5,267.97 180 bottom
JP92  31NCT  [SMT-JUMPER_3_1-NC_TRACE_SILK]  34.8,267.97 180 bottom
JP93  2NCT  [SMT-JUMPER_2_NC_TRACE_SILK]  37.97,238.76 90 bottom
JP94  2NCT  [SMT-JUMPER_2_NC_TRACE_SILK]  39.24,259.08 90 bottom
JP95  [1X02_NO_SILK]  30.99,238.76 0 bottom
JP96  [1X02_NO_SILK]  28.45,259.08 0 top
JP97  2NCT  [SMT-JUMPER_2_NC_TRACE_SILK]  40.51,238.76 90 bottom
JP98  2NCT  [SMT-JUMPER_2_NC_TRACE_SILK]  36.7,259.08 90 bottom
JP99  31NCT  [SMT-JUMPER_3_1-NC_TRACE_SILK]  34.8,230.5 180 bottom
JP100  31NCT  [SMT-JUMPER_3_1-NC_TRACE_SILK]  101.35,267.97 180 bottom
JP101  31NCT  [SMT-JUMPER_3_1-NC_TRACE_SILK]  114.05,267.97 180 bottom
JP102  31NCT  [SMT-JUMPER_3_1-NC_TRACE_SILK]  107.7,267.97 180 bottom
JP103  31NCT  [SMT-JUMPER_3_1-NC_TRACE_SILK]  95,267.97 180 bottom
JP104  2NCT  [SMT-JUMPER_2_NC_TRACE_SILK]  98.17,238.76 90 bottom
JP105  2NCT  [SMT-JUMPER_2_NC_TRACE_SILK]  99.44,259.08 90 bottom
JP106  [1X02_NO_SILK]  91.19,238.76 0 bottom
JP107  [1X02_NO_SILK]  88.65,259.08 0 top
JP108  2NCT  [SMT-JUMPER_2_NC_TRACE_SILK]  100.71,238.76 90 bottom
JP109  2NCT  [SMT-JUMPER_2_NC_TRACE_SILK]  96.9,259.08 90 bottom
JP110  31NCT  [SMT-JUMPER_3_1-NC_TRACE_SILK]  95,230.5 180 bottom
LED1  Yellow  [LED-0603]  9.4,23.24 180 top
LED2  Yellow  [LED-0603]  9.4,45.09 180 top
LED3  BLUE  [LED-0603]  9.4,24.64 0 top
LED4  BLUE  [LED-0603]  9.4,43.69 0 top
LED5  Yellow  [LED-0603]  69.6,23.24 180 top
LED6  BLUE  [LED-0603]  69.6,24.64 0 top
LED7  Yellow  [LED-0603]  69.6,45.09 180 top
LED8  BLUE  [LED-0603]  69.6,43.69 0 top
LED9  Yellow  [LED-0603]  9.4,77.09 180 top
LED10  BLUE  [LED-0603]  9.4,78.49 0 top
LED11  Yellow  [LED-0603]  9.4,98.93 180 top
LED12  BLUE  [LED-0603]  9.4,97.54 0 top
LED13  Yellow  [LED-0603]  69.6,77.09 180 top
LED14  BLUE  [LED-0603]  69.6,78.49 0 top
LED15  Yellow  [LED-0603]  69.6,98.93 180 top
LED16  BLUE  [LED-0603]  69.6,97.54 0 top
LED17  Yellow  [LED-0603]  9.4,130.94 180 top
LED18  BLUE  [LED-0603]  9.4,132.33 0 top
LED19  Yellow  [LED-0603]  9.4,152.78 180 top
LED20  BLUE  [LED-0603]  9.4,151.38 0 top
LED21  Yellow  [LED-0603]  69.6,130.94 180 top
LED22  BLUE  [LED-0603]  69.6,132.33 0 top
LED23  Yellow  [LED-0603]  69.6,152.78 180 top
LED24  BLUE  [LED-0603]  69.6,151.38 0 top
LED25  Yellow  [LED-0603]  9.4,184.78 180 top
LED26  BLUE  [LED-0603]  9.4,186.18 0 top
LED27  Yellow  [LED-0603]  9.4,206.63 180 top
LED28  BLUE  [LED-0603]  9.4,205.23 0 top
LED29  Yellow  [LED-0603]  69.6,184.78 180 top
LED30  BLUE  [LED-0603]  69.6,186.18 0 top
LED31  Yellow  [LED-0603]  69.6,206.63 180 top
LED32  BLUE  [LED-0603]  69.6,205.23 0 top
LED33  Yellow  [LED-0603]  9.4,238.63 180 top
LED34  BLUE  [LED-0603]  9.4,240.03 0 top
LED35  Yellow  [LED-0603]  9.4,260.48 180 top
LED36  BLUE  [LED-0603]  9.4,259.08 0 top
LED37  Yellow  [LED-0603]  69.6,238.63 180 top
LED38  BLUE  [LED-0603]  69.6,240.03 0 top
LED39  Yellow  [LED-0603]  69.6,260.48 180 top
LED40  BLUE  [LED-0603]  69.6,259.08 0 top
LOGO1  SFE_LOGO_NAME_FLAME.2_INCH  [SFE_LOGO_NAME_FLAME_.2]  19.56,21.72 90 bottom
LOGO2  SFE_LOGO_NAME_FLAME.1_INCH  [SFE_LOGO_NAME_FLAME_.1]  25.02,17.02 0 top
LOGO3  SFE_LOGO_NAME_FLAME.2_INCH  [SFE_LOGO_NAME_FLAME_.2]  79.76,21.72 90 bottom
LOGO4  SFE_LOGO_NAME_FLAME.1_INCH  [SFE_LOGO_NAME_FLAME_.1]  85.22,17.02 0 top
LOGO5  SFE_LOGO_NAME_FLAME.2_INCH  [SFE_LOGO_NAME_FLAME_.2]  19.56,75.56 90 bottom
LOGO6  SFE_LOGO_NAME_FLAME.1_INCH  [SFE_LOGO_NAME_FLAME_.1]  25.02,70.87 0 top
LOGO7  SFE_LOGO_NAME_FLAME.2_INCH  [SFE_LOGO_NAME_FLAME_.2]  79.76,75.56 90 bottom
LOGO8  SFE_LOGO_NAME_FLAME.1_INCH  [SFE_LOGO_NAME_FLAME_.1]  85.22,70.87 0 top
LOGO9  SFE_LOGO_NAME_FLAME.2_INCH  [SFE_LOGO_NAME_FLAME_.2]  19.56,129.41 90 bottom
LOGO10  SFE_LOGO_NAME_FLAME.1_INCH  [SFE_LOGO_NAME_FLAME_.1]  25.02,124.71 0 top
LOGO11  SFE_LOGO_NAME_FLAME.2_INCH  [SFE_LOGO_NAME_FLAME_.2]  79.76,129.41 90 bottom
LOGO12  SFE_LOGO_NAME_FLAME.1_INCH  [SFE_LOGO_NAME_FLAME_.1]  85.22,124.71 0 top
LOGO13  SFE_LOGO_NAME_FLAME.2_INCH  [SFE_LOGO_NAME_FLAME_.2]  19.56,183.26 90 bottom
LOGO14  SFE_LOGO_NAME_FLAME.1_INCH  [SFE_LOGO_NAME_FLAME_.1]  25.02,178.56 0 top
LOGO15  SFE_LOGO_NAME_FLAME.2_INCH  [SFE_LOGO_NAME_FLAME_.2]  79.76,183.26 90 bottom
LOGO16  SFE_LOGO_NAME_FLAME.1_INCH  [SFE_LOGO_NAME_FLAME_.1]  85.22,178.56 0 top
LOGO17  SFE_LOGO_NAME_FLAME.2_INCH  [SFE_LOGO_NAME_FLAME_.2]  19.56,237.11 90 bottom
LOGO18  SFE_LOGO_NAME_FLAME.1_INCH  [SFE_LOGO_NAME_FLAME_.1]  25.02,232.41 0 top
LOGO19  SFE_LOGO_NAME_FLAME.2_INCH  [SFE_LOGO_NAME_FLAME_.2]  79.76,237.11 90 bottom
LOGO20  SFE_LOGO_NAME_FLAME.1_INCH  [SFE_LOGO_NAME_FLAME_.1]  85.22,232.41 0 top
R1  1k  [0603]  12.57,23.24 0 top
R2  1k  [0603]  12.57,24.64 0 top
R3  1k  [0603]  12.57,43.69 0 top
R4  1k  [0603]  12.57,45.09 0 top
R5  1k  [0603]  18.29,51.31 0 top
R6  1k  [0603]  18.29,10.67 0 top
R7  1k  [0603]  18.29,9.27 0 top
R8  1k  [0603]  18.29,49.91 0 top
R9  1k  [0603]  72.77,23.24 0 top
R10  1k  [0603]  72.77,24.64 0 top
R11  1k  [0603]  72.77,43.69 0 top
R12  1k  [0603]  72.77,45.09 0 top
R13  1k  [0603]  78.49,51.31 0 top
R14  1k  [0603]  78.49,10.67 0 top
R15  1k  [0603]  78.49,9.27 0 top
R16  1k  [0603]  78.49,49.91 0 top
R17  1k  [0603]  12.57,77.09 0 top
R18  1k  [0603]  12.57,78.49 0 top
R19  1k  [0603]  12.57,97.54 0 top
R20  1k  [0603]  12.57,98.93 0 top
R21  1k  [0603]  18.29,105.16 0 top
R22  1k  [0603]  18.29,64.52 0 top
R23  1k  [0603]  18.29,63.12 0 top
R24  1k  [0603]  18.29,103.76 0 top
R25  1k  [0603]  72.77,77.09 0 top
R26  1k  [0603]  72.77,78.49 0 top
R27  1k  [0603]  72.77,97.54 0 top
R28  1k  [0603]  72.77,98.93 0 top
R29  1k  [0603]  78.49,105.16 0 top
R30  1k  [0603]  78.49,64.52 0 top
R31  1k  [0603]  78.49,63.12 0 top
R32  1k  [0603]  78.49,103.76 0 top
R33  1k  [0603]  12.57,130.94 0 top
R34  1k  [0603]  12.57,132.33 0 top
R35  1k  [0603]  12.57,151.38 0 top
R36  1k  [0603]  12.57,152.78 0 top
R37  1k  [0603]  18.29,159 0 top
R38  1k  [0603]  18.29,118.36 0 top
R39  1k  [0603]  18.29,116.97 0 top
R40  1k  [0603]  18.29,157.61 0 top
R41  1k  [0603]  72.77,130.94 0 top
R42  1k  [0603]  72.77,132.33 0 top
R43  1k  [0603]  72.77,151.38 0 top
R44  1k  [0603]  72.77,152.78 0 top
R45  1k  [0603]  78.49,159 0 top
R46  1k  [0603]  78.49,118.36 0 top
R47  1k  [0603]  78.49,116.97 0 top
R48  1k  [0603]  78.49,157.61 0 top
R49  1k  [0603]  12.57,184.78 0 top
R50  1k  [0603]  12.57,186.18 0 top
R51  1k  [0603]  12.57,205.23 0 top
R52  1k  [0603]  12.57,206.63 0 top
R53  1k  [0603]  18.29,212.85 0 top
R54  1k  [0603]  18.29,172.21 0 top
R55  1k  [0603]  18.29,170.81 0 top
R56  1k  [0603]  18.29,211.46 0 top
R57  1k  [0603]  72.77,184.78 0 top
R58  1k  [0603]  72.77,186.18 0 top
R59  1k  [0603]  72.77,205.23 0 top
R60  1k  [0603]  72.77,206.63 0 top
R61  1k  [0603]  78.49,212.85 0 top
R62  1k  [0603]  78.49,172.21 0 top
R63  1k  [0603]  78.49,170.81 0 top
R64  1k  [0603]  78.49,211.46 0 top
R65  1k  [0603]  12.57,238.63 0 top
R66  1k  [0603]  12.57,240.03 0 top
R67  1k  [0603]  12.57,259.08 0 top
R68  1k  [0603]  12.57,260.48 0 top
R69  1k  [0603]  18.29,266.7 0 top
R70  1k  [0603]  18.29,226.06 0 top
R71  1k  [0603]  18.29,224.66 0 top
R72  1k  [0603]  18.29,265.3 0 top
R73  1k  [0603]  72.77,238.63 0 top
R74  1k  [0603]  72.77,240.03 0 top
R75  1k  [0603]  72.77,259.08 0 top
R76  1k  [0603]  72.77,260.48 0 top
R77  1k  [0603]  78.49,266.7 0 top
R78  1k  [0603]  78.49,226.06 0 top
R79  1k  [0603]  78.49,224.66 0 top
R80  1k  [0603]  78.49,265.3 0 top
U1  ARDUINO  [UNO_R3_SHIELD_NOLABELS]  37.34,33.53 270 top
U2  L298  [POWERSO20_L298_PAD]  36.07,33.53 90 top
U3  L298  [POWERSO20_L298_PAD]  96.27,33.53 90 top
U4  ARDUINO  [UNO_R3_SHIELD_NOLABELS]  97.54,33.53 270 top
U5  74HC1G04  [SOT353]  39.24,19.56 270 top
U6  74HC1G04  [SOT353]  36.07,46.99 180 top
U7  74HC1G04  [SOT353]  99.44,19.56 270 top
U8  74HC1G04  [SOT353]  96.27,46.99 180 top
U9  L298  [POWERSO20_L298_PAD]  36.07,87.38 90 top
U10  ARDUINO  [UNO_R3_SHIELD_NOLABELS]  37.34,87.38 270 top
U11  74HC1G04  [SOT353]  39.24,73.41 270 top
U12  74HC1G04  [SOT353]  36.07,100.84 180 top
U13  L298  [POWERSO20_L298_PAD]  96.27,87.38 90 top
U14  ARDUINO  [UNO_R3_SHIELD_NOLABELS]  97.54,87.38 270 top
U15  74HC1G04  [SOT353]  99.44,73.41 270 top
U16  74HC1G04  [SOT353]  96.27,100.84 180 top
U17  L298  [POWERSO20_L298_PAD]  36.07,141.22 90 top
U18  ARDUINO  [UNO_R3_SHIELD_NOLABELS]  37.34,141.22 270 top
U19  74HC1G04  [SOT353]  39.24,127.25 270 top
U20  74HC1G04  [SOT353]  36.07,154.69 180 top
U21  L298  [POWERSO20_L298_PAD]  96.27,141.22 90 top
U22  ARDUINO  [UNO_R3_SHIELD_NOLABELS]  97.54,141.22 270 top
U23  74HC1G04  [SOT353]  99.44,127.25 270 top
U24  74HC1G04  [SOT353]  96.27,154.69 180 top
U25  L298  [POWERSO20_L298_PAD]  36.07,195.07 90 top
U26  ARDUINO  [UNO_R3_SHIELD_NOLABELS]  37.34,195.07 270 top
U27  74HC1G04  [SOT353]  39.24,181.1 270 top
U28  74HC1G04  [SOT353]  36.07,208.53 180 top
U29  L298  [POWERSO20_L298_PAD]  96.27,195.07 90 top
U30  ARDUINO  [UNO_R3_SHIELD_NOLABELS]  97.54,195.07 270 top
U31  74HC1G04  [SOT353]  99.44,181.1 270 top
U32  74HC1G04  [SOT353]  96.27,208.53 180 top
U33  L298  [POWERSO20_L298_PAD]  36.07,248.92 90 top
U34  ARDUINO  [UNO_R3_SHIELD_NOLABELS]  37.34,248.92 270 top
U35  74HC1G04  [SOT353]  39.24,234.95 270 top
U36  74HC1G04  [SOT353]  36.07,262.38 180 top
U37  L298  [POWERSO20_L298_PAD]  96.27,248.92 90 top
U38  ARDUINO  [UNO_R3_SHIELD_NOLABELS]  97.54,248.92 270 top
U39  74HC1G04  [SOT353]  99.44,234.95 270 top
U40  74HC1G04  [SOT353]  96.27,262.38 180 top
U$1  OSHW-LOGOS  [OSHW-LOGO-S]  27.18,47.5 0 top
U$2  OSHW-LOGOS  [OSHW-LOGO-S]  87.38,47.5 0 top
U$3  OSHW-LOGOS  [OSHW-LOGO-S]  27.18,101.35 0 top
U$4  OSHW-LOGOS  [OSHW-LOGO-S]  87.38,101.35 0 top
U$5  OSHW-LOGOS  [OSHW-LOGO-S]  27.18,155.19 0 top
U$6  OSHW-LOGOS  [OSHW-LOGO-S]  87.38,155.19 0 top
U$7  OSHW-LOGOS  [OSHW-LOGO-S]  27.18,209.04 0 top
U$8  OSHW-LOGOS  [OSHW-LOGO-S]  87.38,209.04 0 top
U$9  OSHW-LOGOS  [OSHW-LOGO-S]  27.18,262.89 0 top
U$10  OSHW-LOGOS  [OSHW-LOGO-S]  87.38,262.89 0 top

## Library data of the parts
C1 C2 C5 C6 C8-C10 C12 C13 C15 C16 C18 C19 C21 C22 C24 C25 C27 C28 C30 = SparkFun-Capacitors; PROD_ID: CAP-08604
C3 C4 C7 C11 C14 C17 C20 C23 C26 C29 = SparkFun-Capacitors; PROD_ID: CAP-12547
D1-D8 D13-D20 D25-D32 D37-D44 D49-D56 D61-D68 D73-D80 D85-D92 D97-D104 D109-D116 = SparkFun-DiscreteSemi; PROD_ID: DIO-08053
D9-D12 D21-D24 D33-D36 D45-D48 D57-D60 D69-D72 D81-D84 D93-D96 D105-D108 D117-D120 = SparkFun-LED; PROD_ID: DIO-00819
E$1 = SparkFun-Retired
E$7 E$8 LOGO1-LOGO20 = SparkFun-Aesthetics
FD1-FD20 U$1-U$10 = SparkFun
H1-H20 = SparkFun-Hardware
J1 J20 J35 J50 J65 J80 J95 J110 J125 J140 = SparkFun-Connectors; PROD_ID: CONN-08438
J2 J4 J6 J9 J11-J15 J18 J23-J30 J33 J38-J45 J48 J53-J60 J63 J68-J75 J78 J83-J90 J93 J98-J105 J108 J113-J120 J123 J128-J135 J138 J143-J150 JP9 JP10 JP18 JP19 JP29 JP30 JP40 JP41 JP51 JP52 JP62 JP63 JP73 JP74 JP84 JP85 JP95 JP96 JP106 JP107 = SparkFun-Connectors
J3 J5 J21 J22 J36 J37 J51 J52 J66 J67 J81 J82 J96 J97 J111 J112 J126 J127 J141 J142 = SparkFun-Connectors; PROD_ID: CONN-08437
J7 J16 J31 J46 J61 J76 J91 J106 J121 J136 = SparkFun-Connectors; PROD_ID: 2xCONN-08399; SF_ID: 2xPRT-08084
J8 J17 J32 J47 J62 J77 J92 J107 J122 J137 = SparkFun-Connectors; PROD_ID: CONN-09696
J10 J19 J34 J49 J64 J79 J94 J109 J124 J139 = SparkFun-Connectors; PROD_ID: CONN-08399
JP1-JP8 JP11-JP17 JP20-JP28 JP31-JP39 JP42-JP50 JP53-JP61 JP64-JP72 JP75-JP83 JP86-JP94 JP97-JP105 JP108-JP110 = SparkFun-Jumpers
LED1 LED2 LED5 LED7 LED9 LED11 LED13 LED15 LED17 LED19 LED21 LED23 LED25 LED27 LED29 LED31 LED33 LED35 LED37 LED39 = SparkFun-LED; PROD_ID: DIO-09003
LED3 LED4 LED6 LED8 LED10 LED12 LED14 LED16 LED18 LED20 LED22 LED24 LED26 LED28 LED30 LED32 LED34 LED36 LED38 LED40 = SparkFun-LED; PROD_ID: DIO-08575
R1-R80 = SparkFun-Resistors; PROD_ID: RES-07856
U1 U4 U10 U14 U18 U22 U26 U30 U34 U38 = SparkFun-Boards
U2 U3 U9 U13 U17 U21 U25 U29 U33 U37 = SparkFun-IC-Special-Function; PROD_ID: IC-09133
U5-U8 U11 U12 U15 U16 U19 U20 U23 U24 U27 U28 U31 U32 U35 U36 U39 U40 = SparkFun-IC-Logic; PROD_ID: COMP-08268